# Altium PCB PCB_C70005-A2.PcbDoc (part 2 of 3)
Units mm, origin at the board's own origin, x right, y up, seen from the top; angles counter-clockwise.
Board outline 80.01 x 50.8 mm, 2 copper layers (Top Layer, Bottom Layer); 96 components, 58 nets, 254 pads, 376 vias.
Unrouted connection lines stored in the file: 49.
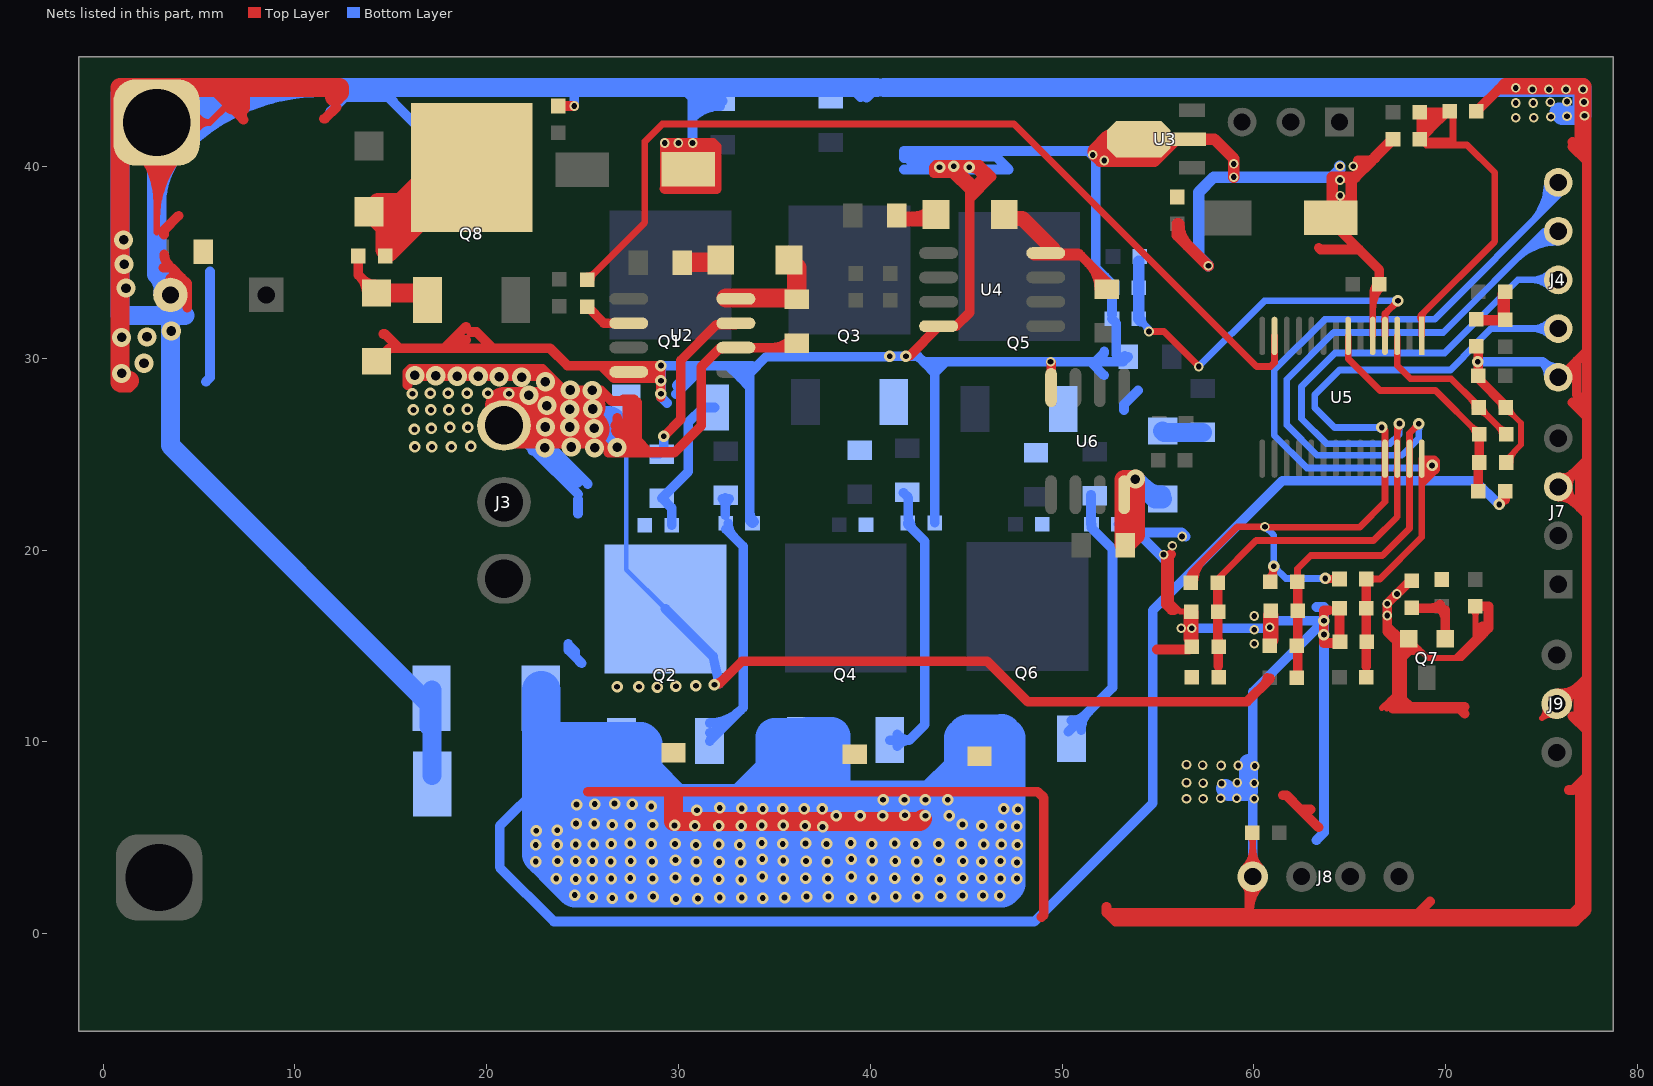
[diagram p2: the nets of this part, all layers, seen from the top]

## Via types
v1: diameter 0.6, hole 0.3, Top Layer to Bottom Layer, 247 vias
v2: diameter 1, hole 0.5, Top Layer to Bottom Layer, 69 vias
v3: diameter 0.5, hole 0.3, Top Layer to Bottom Layer, 60 vias

## Nets (pads, with @x,y where several pads share a name; then routed paths per layer and width w, separated by ;. In a path a pad name is that pad's centre, name@x,y a point inside that pad or via, vN(x,y) a via of type N, cw(c..) or ccw(c..) an arc to the next point about the centre after c; other vN are vias at no path point) (continued)
GND: C1.1 C4.1 C5.1 C6.2 C7.1 C8.1 C9.2 C10.2 C11.2 C12.1 C14.1 C16.1 C17.1 C19.1 C20.2 C21.1 C23.2 C25.2 C26.1 C27.1 D4.1 J2.1 J4.5 J7.3 J8.4 J9.2 Q7.2 R10.2 R12.1 R18.2 R22.2 R25.2 R31.2 R37.2 R39.2 R40.2 R44.1 R46.1 Rt1.2 U2.4 U3.2 U4.4 U5.5 U6.4 | length 766.8
  Top Layer w0.3: 55.708,19.806 55.677,19.776 55.677,17.272 56.159,16.789 56.591,16.789 56.744,16.789 ; 66.675,11.76 67.094,12.179 ; 66.929,11.725 66.929,11.773 67.335,12.179 ; 67.335,15.367 67.361,15.342 67.361,14.643 ; 67.412,11.725 67.412,11.963 67.627,12.179 ; 67.742,14.275 68.155,14.688 ; 67.894,11.725 67.894,11.913 67.627,12.179 ; 68.386,11.725 68.281,11.831 67.742,12.37 67.361,12.751 ; C21.1@71.388,16.905 cw(c70.994,16.511) 71.552,16.511 cw(c72.109,16.511) C21.1@71.715,16.905 ; C21.1@71.552,17.069 71.552,15.443 70.485,14.376 ; 72.009,15.697 72.009,15.545 70.841,14.376 70.485,14.376 ; C26.1@73.127,27.201 cw(c73.127,26.643) 73.521,27.038 cw(c73.915,27.432) C26.1@73.358,27.432 ; C26.1@73.127,27.432 73.937,26.622 73.937,25.487 73.152,24.702 73.152,24.562 ; 73.383,24.562 cw(c74.278,24.562) 73.645,25.195 ; J9.2@75.173,11.797 cw(c74.63,11.629) 75.032,11.227 ; J9.2@75.601,11.368 ccw(c75.433,10.825) 75.032,11.227 ; J9.2@75.794,11.989 75.032,11.227 ; 67.094,12.179 67.361,12.446 ; 67.094,12.179 67.335,12.179 ; 67.335,12.179 67.627,12.179 ; 67.361,12.446 67.361,12.751 ; 67.361,12.446 67.627,12.179 ; 67.361,12.751 67.361,14.643 ; 67.361,14.643 67.405,14.688 ; 67.405,14.688 67.742,14.688 68.155,14.688 ; 67.405,14.688 67.56,14.843 ; 67.56,14.843 67.742,14.843 68.609,14.843 ; 67.56,14.843 67.742,15.024 Q7.2@68.085,15.367 68.609,14.843 ; 68.155,14.688 68.764,14.688 ; 68.609,14.843 68.764,14.688 ; 68.764,14.688 69.075,14.376 70.485,14.376
  Top Layer w0.35: J2.1@1.574,41.071 cw(c-1.371,38.126) 2.794,38.126 cw(c6.959,38.126) J2.1@4.014,41.071 ; J2.1@1.822,41.319 cw(c-0.526,38.971) 2.794,38.971 cw(c6.114,38.971) J2.1@3.766,41.319 ; J2.1@2.069,41.566 cw(c0.319,39.816) 2.794,39.816 cw(c5.269,39.816) J2.1@3.519,41.566 ; 2.794,36.576 J2.1@2.794,42.291 5.563,42.291 ; 2.794,37.282 cw(c7.803,37.282) J2.1@4.261,40.824 ; C9.2@3.683,33.608 3.75,33.541 C9.2@3.763,33.528 ; J2.1@4.45,41.807 cw(c5.096,41.618) 5.096,42.291 cw(c5.096,42.964) J2.1@4.45,42.775 ; J2.1@4.786,41.709 cw(c5.563,41.482) 5.563,42.291 ; J2.1@4.786,42.873 ccw(c5.563,43.1) 5.563,42.291 ; 7.163,43.891 6.764,43.493 6.756,43.485 6.51,43.239 5.563,42.291 ; J8.4@59.502,3.414 ccw(c58.435,4.481) 59.944,4.481 ccw(c61.453,4.481) J8.4@60.386,3.414 ; C20.2@59.773,5.112 cw(c59.36,4.699) 59.944,4.699 ; C20.2@59.919,5.258 59.944,5.232 J8.4@59.944,2.972 ; 59.944,4.822 cw(c60.355,4.822) C20.2@60.064,5.112 ; J8.4@60.02,2.972 J8.4@60.02,3.632 ; U5.5@66.198,31.166 66.198,33.508 C23.2@66.548,33.858 ; 66.198,32.515 cw(c67.891,32.515) C23.2@66.694,33.713 ; 66.198,33.36 cw(c67.046,33.36) C23.2@66.446,33.96
  Top Layer w0.5: 24.213,29.616 25.959,29.616 ; U2.4@27.772,29.286 U2.4@27.407,29.286 26.568,29.286 26.238,29.616 ; U2.4@28.169,29.21 28.677,29.21 v1(29.083,29.616) ; v1@29.068,27.976 29.083,27.991 v1(29.083,28.143) v1(29.083,28.829) 29.083,29.159 ; v1@43.383,40.03 43.307,39.954 43.307,39.649 44.272,39.649 45.187,38.735 ; v1@44.323,40.081 44.499,39.905 45.187,39.218 45.187,38.735 ; 45.187,36.246 45.187,38.33 45.187,38.735 ; v3@49.403,29.794 49.428,29.769 U6.4@49.428,28.473 ; 56.591,16.789 56.591,15.342 56.871,15.621 ; 56.744,16.789 56.871,16.789 56.871,15.621 ; 56.864,15.051 56.871,15.058 56.871,15.621 ; C11.2@64.383,36.773 65.483,35.673 66.548,34.608 C23.2@66.548,33.858 ; 64.44,15.469 64.465,15.494 64.465,16.967 ; 67.584,15.367 ccw(c67.584,15.867) Q7.2@67.938,15.514 ; Q7.2@68.085,15.367 67.615,15.367 ; R46.1@68.224,18.39 68.147,18.39 v3(66.954,17.197) v3(66.954,16.586) 66.954,16.027 ; C21.1@71.552,17.069 72.238,17.069 ; C27.1@71.603,30.632 71.704,30.531 R44.1@71.704,29.083 71.704,28.932 73.127,27.51 C26.1@73.127,27.432 ; R12.1@71.603,42.875 R12.1@71.806,43.078 ; C26.1@72.848,27.788 cw(c72.492,27.432) C26.1@72.996,27.432 ; J7.3@75.87,23.292 75.968,23.292 J7.3@76.251,23.292 ; J4.5@75.87,28.804 J4.5@75.87,29.007 J4.5@75.993,29.007 ; 76.632,29.007 J4.5@75.993,29.007 ; 77.365,27.584 76.846,28.103 76.846,29.859 ; 77.365,30.378 76.846,29.859 ; 25.959,29.616 26.238,29.616 ; 25.959,29.616 26.619,28.956 28.103,28.956 28.88,28.956 29.083,29.159 ; 26.238,29.616 v1(29.083,29.616) ; 29.083,29.159 v1(29.083,29.616) ; 66.954,16.027 67.615,15.367 ; 66.954,16.027 66.954,15.748 67.335,15.367 67.615,15.367 ; J4.5@75.993,29.007 76.846,29.859
  Top Layer w0.508: 0.635,28.702 0.863,28.474 1.381,28.474 ; 3.15,34.722 3.565,34.722 4.094,34.193 ; 3.175,36.449 3.175,36.674 3.937,37.436 ; 3.632,34.29 3.509,34.167 C9.2@3.509,33.608 ; 4.393,32.639 4.393,33.894 4.094,34.193 ; 5.842,43.907 6.51,43.239 7.26,42.489 ; 6.756,44.119 6.756,43.501 6.764,43.493 7.163,43.094 ; 7.163,43.891 7.26,43.794 7.26,42.998 ; 7.315,42.434 7.26,42.489 ; 7.315,42.942 7.26,42.998 ; 11.506,42.494 11.573,42.494 12.166,43.088 ; D4.1@14.249,29.845 14.92,30.515 15.443,30.515 ; 14.605,31.267 14.691,31.267 15.443,30.515 ; 18.92,30.947 18.872,30.947 18.44,30.515 ; 18.92,31.648 17.787,30.515 ; 19.177,31.369 19.466,31.369 20.32,30.515 ; C5.1@23.8,43.155 v3(24.562,43.155) ; 24.213,29.616 23.314,30.515 20.32,30.515 ; U2.4@27.772,29.286 28.103,28.956 ; v1@42.012,30.099 U4.4@43.586,31.674 ; v1@43.383,40.03 43.434,40.081 44.323,40.081 45.706,40.081 46.322,39.465 45.187,38.33 ; U4.4@43.561,31.674 U4.4@43.586,31.674 ; v1@44.499,39.905 45.49,39.905 45.72,39.675 ; 45.187,36.246 45.187,32.385 44.475,31.674 U4.4@43.586,31.674 ; 45.187,38.735 45.755,39.303 46.101,39.303 ; v3(51.6,40.602) 51.968,40.234 52.719,40.234 ; 52.324,1.397 52.324,1.092 ; 52.77,40.284 52.719,40.234 ; 54.954,14.814 56.622,14.814 56.769,14.961 ; 55.677,19.776 55.408,19.507 55.408,17.159 55.702,16.866 55.855,16.866 ; U3.2@56.544,41.429 56.034,41.429 54.839,40.234 52.719,40.234 ; J8.4@59.558,2.586 cw(c59.055,2.083) 59.766,2.083 ; 59.766,1.224 cw(c61.691,1.224) J8.4@60.33,2.586 ; J8.4@59.944,2.972 59.766,2.794 59.766,1.041 ; 61.519,7.214 61.699,7.214 62.436,6.477 ; 62.951,6.477 62.436,6.477 ; 63.373,5.54 62.436,6.477 ; 63.38,35.763 63.47,35.673 65.483,35.673 ; 63.916,16.856 63.643,16.856 63.643,15.148 64.424,15.148 64.491,15.215 ; 65.42,40.312 66.144,40.312 66.294,40.462 ; 67.261,11.725 67.412,11.725 67.894,11.725 68.386,11.725 70.738,11.725 70.993,11.47 ; v3@67.347,17.596 v3(67.459,17.707) ; 67.742,12.37 67.742,14.275 67.742,14.688 67.742,14.843 Q7.2@67.742,15.024 ; 68.281,11.831 70.993,11.831 ; 69.19,1.676 68.555,1.041 ; 71.73,15.697 72.009,15.697 72.238,15.926 ; R12.1@71.806,43.078 72.746,44.018 ; 71.907,16.027 72.009,15.926 72.238,15.926 ; 72.243,16.712 72.243,17.063 72.238,17.069 72.238,15.926 ; J9.2@75.794,11.989 76.019,11.989 76.922,12.892 ; J9.2@75.863,12.53 ccw(c76.024,13.79) 76.922,12.892 ; J7.3@75.87,22.796 cw(c75.87,21.49) 76.793,22.413 ; J7.3@75.968,23.292 76.649,23.973 ; J7.3@75.972,22.806 cw(c76.109,22.154) 76.581,22.625 ; J7.3@75.976,23.776 ccw(c76.133,24.489) 76.649,23.973 ; J9.2@76.34,11.989 cw(c77.114,11.989) 76.566,12.536 ; J7.3@76.363,23.24 ccw(c77.117,23.161) 76.581,22.625 ; 76.421,7.493 76.654,7.493 77.365,8.204 ; 76.619,11.33 77.365,10.584 ; 76.619,23.973 76.649,23.973 ; 76.619,27.69 77.365,26.944 ; 76.619,41.025 77.365,40.279 ; 76.619,41.275 77.365,40.529 ; 76.647,23.971 ccw(c77.326,23.292) 76.366,23.292 ccw(c77.455,23.292) 76.685,22.521 ; 76.987,7.671 76.987,1.422 76.606,1.041 68.555,1.041 ; 77.089,11.278 76.922,11.444 76.922,12.892 ; 77.089,23.546 76.997,23.454 ; C9.2@3.509,33.608 C9.2@3.509,33.299 3.75,33.541 C9.2@3.962,33.753 ; C9.2@3.509,33.608 C9.2@3.962,34.061 ; C9.2@3.962,33.753 C9.2@3.962,34.061 ; C9.2@3.962,33.753 4.094,33.884 4.094,34.193 ; C9.2@3.962,34.061 4.094,34.193 ; 7.163,43.094 7.26,42.997 ; 7.163,43.094 7.26,42.998 ; 7.26,42.489 7.26,42.997 ; 15.443,30.515 17.787,30.515 ; 17.787,30.515 18.44,30.515 ; 18.44,30.515 20.32,30.515 ; v3@29.286,41.078 29.286,38.862 29.261,38.837 29.286,38.811 31.979,38.811 31.979,40.767 ; v3@29.286,41.078 v3(29.286,41.224) v3(29.997,41.224) v3(30.734,41.224) ; v3@29.286,41.078 29.607,40.757 ; 29.607,40.757 29.616,40.767 ; 29.607,40.757 C10.2@30.512,39.852 30.734,40.074 30.734,40.767 ; 29.616,40.767 29.997,40.767 30.734,40.767 ; 29.616,40.767 29.896,41.046 v3@30.734,41.046 ; 30.734,40.767 31.979,40.767 ; 30.734,40.767 v3@30.734,41.046 ; v3@30.734,41.046 31.979,41.046 ; v3@30.734,41.046 v3(30.734,41.224) ; v3(30.734,41.224) 31.801,41.224 31.979,41.046 ; 31.979,40.767 31.979,41.046 ; 52.324,1.092 52.781,0.635 60.173,0.635 ; 52.324,1.092 59.715,1.092 59.766,1.041 ; 59.766,1.041 68.555,1.041 ; 59.766,1.041 60.173,0.635 ; 60.173,0.635 76.784,0.635 77.365,1.216 77.365,8.204 ; 72.746,44.018 v3(74.524,44.018) v3(75.387,44.018) v3(76.276,44.018) 76.886,44.018 76.962,43.942 76.962,41.348 77.365,40.945 ; 72.746,44.018 73.092,44.365 76.276,44.365 77.216,44.365 77.365,44.216 77.365,40.945 ; 76.581,22.625 76.997,22.209 ; 76.649,23.973 76.835,23.973 ; 76.649,23.973 77.365,24.689 ; 76.835,23.973 77.17,23.973 77.365,23.778 ; 76.835,23.973 76.997,23.811 76.997,23.454 ; 76.922,12.892 77.365,13.335 ; 76.997,22.209 77.365,21.841 ; 76.997,22.209 76.997,23.454 ; 77.365,8.204 77.365,10.584 ; 77.365,10.584 77.365,13.335 ; 77.365,13.335 77.365,21.841 ; 77.365,21.841 77.365,23.778 ; 77.365,23.778 77.365,24.689 ; 77.365,24.689 77.365,26.944 ; 77.365,26.944 77.365,27.584 77.365,30.378 77.365,40.279 ; 77.365,40.279 77.365,40.529 ; 77.365,40.529 77.365,40.945 ; 3.188,35.42 ccw(c3.964,35.42) 3.415,34.871 cw(c3.964,35.42) 3.188,35.42
  Top Layer w0.6: 56.007,37.008 56.007,36.424 v3@57.62,34.811 ; 56.088,37.008 ccw(c57.694,37.008) 56.558,35.872 ; U3.2@56.544,41.429 57.936,41.429 58.953,40.411 v3(58.953,40.132) v3(58.953,39.446) ; C11.2@64.014,37.338 C11.2@64.084,37.407 ; C11.2@65.075,37.427 65.075,38.398 ; 66.144,40.312 65.278,39.446 ; 66.294,40.462 C7.1@67.259,41.427 ; C11.2@64.084,37.407 65.075,38.398 ; C11.2@64.084,37.407 64.084,38.481 64.084,39.446 65.278,39.446 ; 65.075,38.398 65.075,39.243 65.278,39.446
  Top Layer w0.8: 60.884,15.316 60.884,16.586
  Top Layer w1: 1.381,28.829 1.305,28.753 0.881,28.753 J2.1@0.881,40.378 ; J2.1@2.794,42.291 J2.1@0.881,40.378 ; 6.756,43.205 6.756,43.485 6.756,43.501 ; 7.163,43.094 7.163,43.891 7.163,44.119 ; 12.065,43.619 12.319,43.873 12.319,44.119 7.163,44.119 ; J2.1@0.881,40.378 0.881,44.119 6.756,44.119 7.163,44.119 ; 51.816,40.767 53.332,40.767 U3.2@53.994,41.429 52.478,41.429 51.816,40.767
  Bottom Layer w0.3: R37.2@53.097,21.173 cw(c53.491,20.778) 53.491,21.336 cw(c53.491,21.894) R37.2@53.097,21.499
  Bottom Layer w0.35: J2.1@2.794,42.291 4.622,44.119 4.801,44.298
  Bottom Layer w0.5: v1@29.083,29.642 29.108,29.616 30.328,29.616 ; 29.921,28.575 29.921,28.6 30.328,29.007 ; 33.706,22.071 ccw(c34.542,22.071) R10.2@33.951,21.479 ; 33.833,29.595 33.577,29.339 ; 33.833,29.616 33.299,29.616 ; R10.2@33.858,21.387 33.706,21.539 33.706,28.495 ; 41.759,39.84 47.231,39.84 46.558,40.513 ; 42.215,40.513 42.494,40.792 46.279,40.792 ; R22.2@43.358,21.412 43.358,29.235 ; 43.891,40.513 46.558,40.513 ; 52.192,30.353 52.192,30.272 51.74,29.82 ; 52.197,29.108 51.486,29.82 ; 52.512,29.82 ccw(c52.512,30.876) C17.1@53.259,30.129 ; C8.1@52.603,32.055 52.832,31.826 52.832,30.175 C17.1@53.188,29.82 ; C8.1@52.603,32.258 52.603,33.882 52.237,34.248 51.75,34.735 51.75,40.401 51.359,40.792 46.279,40.792 ; R37.2@52.934,21.336 53.511,21.336 ; C17.1@53.442,30.074 C17.1@53.188,29.82 ; v3(56.769,15.926) 60.782,15.926 v3(60.833,15.977) 61.163,16.307 v1(63.652,16.307) 59.944,12.598 J8.4@59.944,2.972 ; v1(71.679,29.82) 75.057,29.82 ; J4.5@75.37,29.024 ccw(c74.3,29.062) 75.057,29.82 ; J4.5@75.852,29.506 cw(c75.814,30.577) 75.057,29.82 ; J4.5@75.87,29.007 75.057,29.82 ; 30.328,29.007 30.937,29.616 ; 30.328,29.007 30.328,29.616 ; 30.328,29.616 30.937,29.616 ; 30.937,29.616 31.35,29.616 32.584,29.616 ; 32.584,29.616 33.299,29.616 ; 32.584,29.616 33.219,28.981 ; 33.219,28.981 33.706,28.495 ; 33.219,28.981 33.577,29.339 ; 33.219,28.981 33.219,29.536 33.299,29.616 ; 33.299,29.616 33.577,29.339 ; 33.577,29.339 33.706,29.21 ; 33.706,28.495 33.706,29.21 ; 33.706,29.21 34.573,30.078 40.873,30.078 40.894,30.099 v1(41.021,30.099) v1(41.859,30.099) 42.494,30.099 42.774,29.82 ; 42.774,29.82 42.977,29.82 ; 42.774,29.82 42.875,29.718 ; 42.875,29.718 43.358,29.235 ; 42.875,29.718 42.977,29.82 ; 42.977,29.82 43.942,29.82 ; 43.358,29.235 43.942,29.82 ; 43.942,29.82 v3(49.403,29.82) 51.486,29.82 ; 46.279,40.792 46.558,40.513 ; 51.486,29.82 51.74,29.82 ; 51.74,29.82 C17.1@53.188,29.82
  Bottom Layer w0.508: 5.359,28.778 5.579,28.998 5.579,34.519 ; 11.862,42.875 12.598,43.612 13.08,43.612 ; 12.573,44.119 13.08,43.612 ; 15.113,43.416 14.917,43.612 14.859,43.612 ; 16.18,42.291 14.859,43.612 ; v3(24.562,43.155) 24.562,43.967 24.714,44.119 ; v1@29.083,29.642 v1(29.083,29.616) v1(29.083,28.829) v1(29.083,28.143) 29.083,27.978 29.397,27.663 ; v3(29.286,41.224) v3(29.997,41.224) v3(30.734,41.224) 30.734,42.545 ; 29.873,28.139 31.35,29.616 ; 30.175,44.119 30.734,43.56 30.734,43.028 ; 30.751,42.562 cw(c32.182,41.131) C1.1@32.182,43.155 ; 31.42,44.119 31.42,43.713 30.734,43.028 ; C1.1@32.051,43.191 ccw(c31.497,42.264) 30.734,43.028 ; C1.1@32.309,43.409 31.598,43.409 30.734,42.545 ; 39.192,43.916 39.489,43.619 ; 39.805,43.581 40.343,44.119 40.716,44.119 ; 41.759,40.437 41.759,40.819 51.772,40.819 51.799,40.792 ; 51.359,40.792 51.799,40.792 ; 52.192,33.401 52.192,34.203 52.237,34.248 ; v3@52.197,40.395 51.799,40.792 ; 53.229,27.305 53.229,27.584 53.966,28.321 ; 53.511,21.336 53.934,20.914 ; v3@55.296,19.551 53.934,20.914 ; v3@56.45,20.706 56.242,20.914 53.934,20.914 ; 63.265,4.872 63.662,5.269 63.662,17.033 63.265,17.033 ; 13.08,43.612 14.859,43.612 ; 30.734,42.545 30.734,43.028
  Bottom Layer w0.6: v3(57.633,34.823) 57.125,35.331 57.125,38.659 57.912,39.446 v3(58.953,39.446) 64.084,39.446 64.491,39.853 v3(64.491,40.005)
  Bottom Layer w1: 2.794,35.991 ccw(c6.201,35.991) C9.2@3.792,33.582 ; 2.794,38.066 cw(c7.019,38.066) 4.031,41.054 cw(c11.432,33.653) 11.432,44.119 ; J2.1@2.794,42.291 2.794,34.37 ; C9.2@3.115,33.366 ccw(c1.981,33.557) 2.794,34.37 ; J2.1@3.324,41.761 cw(c9.018,36.067) 9.018,44.119 ; 4.267,32.233 3.509,32.233 ; 16.993,10.795 16.993,11.963 3.509,25.447 3.509,32.233 ; 17.145,8.255 17.145,12.7 ; 40.343,44.119 31.42,44.119 30.175,44.119 24.714,44.119 12.573,44.119 4.622,44.119 1.21,44.119 0.881,43.79 0.881,36.17 0.881,32.233 3.509,32.233 ; 40.716,44.119 75.387,44.119 77.119,44.119 77.119,42.672 76.073,42.672 75.921,42.824 ; 42.215,40.513 43.891,40.513 ; 58.522,7.567 58.674,7.414 59.131,7.414 59.72,7.414 59.72,8.861 ; 2.794,34.37 3.509,33.655 C9.2@3.509,33.299 3.509,32.233
  other v1: 63.652,15.596 43.612,39.954 45.161,39.954 44.348,40.005
  other v2: 0.965,29.21 2.134,29.743 0.965,31.09 2.286,31.115 3.556,31.42 1.194,33.655 1.092,34.9 1.067,36.17
  other v3: 56.49,7.036 57.353,7.036 60.02,7.036 58.268,7.061 59.106,7.061 58.318,7.823 57.353,7.849 60.02,7.849 56.49,7.874 59.131,7.874 60.046,8.738 58.293,8.763 59.182,8.763 57.328,8.788 56.49,8.814 60.02,15.113 60.02,15.85 56.21,15.926 60.02,16.561 55.296,19.761 55.753,20.218 56.261,20.706 64.503,38.481 64.491,39.294 65.185,40.005 52.197,40.31 73.66,42.545 74.6,42.545 75.489,42.596 76.327,42.621 77.241,42.647 73.66,43.307 74.574,43.307 75.463,43.358 77.216,43.358 76.327,43.383 77.165,44.018 73.66,44.094
HA: C14.2 J4.2 R15.2 R18.1 R20.2 U5.27 | length 52.8
  Top Layer w0.35: 62.281,18.034 62.281,18.364 62.281,19.025 62.967,19.71 66.7,19.71 68.118,21.128 U5.27@68.118,24.766 68.118,26.091 v1(68.605,26.579) v1@68.605,26.67 ; v1@68.48,26.579 cw(c68.179,26.579) 68.392,26.365 cw(c68.605,26.152) v1@68.605,26.454
  Top Layer w0.5: 62.281,13.487 62.281,18.034 ; 62.281,18.364 62.401,18.484
  Bottom Layer w0.35: v1@68.517,26.49 cw(c68.304,26.277) 68.605,26.277 cw(c68.907,26.277) v1@68.694,26.49 ; v1(68.605,26.579) 68.605,25.832 67.716,24.943 63.297,24.943 61.722,26.518 61.722,28.905 64.16,31.344 69.875,31.344 75.159,36.627 J4.2@75.87,36.627 ; 73.674,35.142 cw(c75.87,32.947) J4.2@75.87,36.052 ; 74.272,35.74 cw(c75.87,34.142) J4.2@75.87,36.402 ; 74.869,36.337 cw(c75.87,35.337) J4.2@75.87,36.752
HB: C16.2 J4.1 R24.2 R25.1 R26.2 U5.28 | length 56.2
  Top Layer w0.35: R26.2@65.862,18.517 R26.2@65.862,18.491 66.573,18.491 68.758,20.676 68.758,23.419 ; R26.2@66.008,18.346 cw(c66.36,17.994) 66.36,18.491 cw(c66.36,18.989) R26.2@66.008,18.637 ; v1(69.291,24.409) 69.266,24.409 v1@69.19,24.334 ; v1@69.291,24.663 69.189,24.766 ; 68.758,23.419 69.113,23.774 ; 68.758,23.419 U5.28@68.758,23.774 ; U5.28@68.758,23.774 69.113,23.774 ; U5.28@68.758,23.774 U5.28@68.758,24.079 ; U5.28@68.758,24.079 68.936,24.079 ; U5.28@68.758,24.079 U5.28@68.758,24.766 ; U5.28@68.758,24.766 69.189,24.766 ; U5.28@68.758,24.766 v1@69.038,24.486 ; 68.936,24.079 v1@69.19,24.334 ; 68.936,24.079 69.063,24.079 v1@69.291,24.308 ; 68.936,24.079 68.936,24.384 v1@69.038,24.486 ; v1@69.038,24.486 v1@69.19,24.334 ; 69.113,23.774 69.291,23.952 ; 69.189,24.766 69.392,24.766 69.52,24.638 69.52,24.181 69.291,23.952 ; v1@69.19,24.334 69.203,24.321 69.216,24.308 v1@69.291,24.308 ; 69.291,23.952 v1@69.291,24.308
  Top Layer w0.5: 65.862,13.919 R26.2@65.862,18.491
  Bottom Layer w0.35: 68.683,24.282 ccw(c68.683,25.018) v1@69.203,24.498 ; v1(69.291,24.409) 69.164,24.282 62.763,24.282 61.062,25.984 61.062,29.388 63.703,32.029 69.418,32.029 75.87,38.481 J4.1@75.87,39.167 ; 74.403,37.014 ccw(c72.251,39.167) J4.1@75.295,39.167 ; 75.001,37.612 ccw(c73.446,39.167) J4.1@75.645,39.167 ; 75.598,38.209 ccw(c74.641,39.167) J4.1@75.995,39.167
HC: C19.2 J4.3 R28.2 R31.1 R32.2 U5.26 | length 47.1
  Top Layer w0.35: 58.102,18.479 60.122,20.498 66.243,20.498 67.478,21.732 U5.26@67.478,24.145 ; 58.115,13.97 58.141,13.945 58.191,13.894 ; U5.26@67.462,24.13 U5.26@67.478,24.145 ; 67.478,26.023 cw(c68.161,26.023) v1@67.678,26.505 ; v1(67.589,26.594) 67.478,26.482 U5.26@67.478,24.766 U5.26@67.478,24.145
  Top Layer w0.5: 58.115,15.342 58.115,18.288 ; 58.141,13.945 58.141,15.342
  Bottom Layer w0.35: v1@67.501,26.505 cw(c67.288,26.292) 67.589,26.292 cw(c67.891,26.292) v1@67.678,26.505 ; v1(67.589,26.594) 67.589,26.035 67.101,25.547 63.785,25.547 62.484,26.848 62.484,28.524 64.237,30.277 69.952,30.277 73.762,34.087 J4.3@75.87,34.087 ; J4.3@75.463,33.68 ccw(c74.482,32.699) 74.482,34.087 ccw(c74.482,35.475) J4.3@75.463,34.493
HS: J4.4 R20.1 R26.1 R32.1 U5.25 | length 52
  Top Layer w0.35: R20.1@56.573,18.434 ccw(c56.221,18.785) 56.718,18.785 ccw(c57.216,18.785) R20.1@56.864,18.434 ; R20.1@56.574,18.288 cw(c57.453,18.288) 56.832,18.909 ; R20.1@56.718,18.288 56.718,18.796 59.131,21.209 v3(60.579,21.209) 60.604,21.184 65.507,21.184 66.838,22.515 U5.25@66.838,24.766 66.838,26.228 v1(66.675,26.391) ; R20.1@56.924,18.288 cw(c58.648,18.288) 57.429,19.507 ; R32.1@60.728,18.498 ccw(c60.19,19.152) v1(61.036,19.152) 61.036,18.517 R32.1@60.858,18.339 ; v1@60.928,19.089 cw(c60.667,18.938) 60.958,18.86 cw(c61.25,18.782) v1@61.099,19.043 ; v1@60.948,19.063 cw(c60.734,18.85) 61.036,18.85 cw(c61.338,18.85) v1@61.125,19.063 ; v1(63.729,18.517) 63.754,18.491 R26.1@64.465,18.491 ; v1@63.791,18.408 cw(c64.006,18.036) R26.1@64.117,18.451 ; v1@63.817,18.605 ccw(c64.092,18.88) R26.1@64.092,18.491 ; v1@63.824,18.597 ccw(c64.009,18.753) 64.072,18.519 ; R26.1@64.32,18.346 ccw(c63.968,17.994) 63.968,18.491 ccw(c63.968,18.989) R26.1@64.32,18.637
  Bottom Layer w0.35: v3(60.579,21.209) 60.604,21.209 61.036,20.777 v1(61.036,19.152) 61.671,18.517 v1(63.729,18.517) ; v1@60.948,19.24 ccw(c60.734,19.453) 61.036,19.453 ccw(c61.338,19.453) v1@61.125,19.24 ; v1@61.036,19.027 cw(c61.036,18.725) 61.25,18.938 cw(c61.463,19.152) v1@61.161,19.152 ; v1@63.64,18.428 ccw(c63.427,18.215) 63.427,18.517 ccw(c63.427,18.818) v1@63.64,18.605 ; v1@66.587,26.302 ccw(c66.373,26.089) 66.373,26.391 ccw(c66.373,26.692) v1@66.587,26.479 ; v1(66.675,26.391) 64.211,26.391 63.17,27.432 63.17,28.092 64.465,29.388 70.256,29.388 70.95,30.081 70.95,30.122 72.375,31.547 J4.4@75.87,31.547 ; J4.4@75.463,31.14 ccw(c74.482,30.159) 74.482,31.547 ccw(c74.482,32.935) J4.4@75.463,31.953
IAVG: C26.2 R41.1 U5.3 | length 10.7
  Top Layer w0.35: U5.3@67.478,31.166 67.478,29.626 68.174,28.931 70.282,28.931 C26.2@71.501,27.711 ; 71.342,27.87 cw(c70.904,27.432) C26.2@71.524,27.432 ; C26.2@71.465,27.748 ccw(c71.73,28.013) C26.2@71.73,27.638 ; C26.2@71.73,27.226 cw(c71.73,26.667) 72.125,27.062 ; C26.2@71.73,27.432 71.755,27.432 R41.1@73.152,26.035 ; C26.2@71.936,27.432 ccw(c72.372,27.432) C26.2@72.063,27.124 ; R41.1@72.946,26.035 ccw(c72.449,26.035) 72.8,26.387 ccw(c73.152,26.738) R41.1@73.152,26.241
IOCP: C25.1 R38.2 R41.2 U5.7 | length 13.4
  Top Layer w0.35: U5.7@64.918,31.166 64.918,29.977 66.573,28.321 69.469,28.321 R41.2@71.755,26.035 ; R41.2@71.549,26.035 ccw(c71.052,26.035) 71.403,26.387 ccw(c71.755,26.738) R41.2@71.755,26.241 ; 71.704,24.511 71.755,24.562
  Top Layer w0.5: 71.704,23.063 71.704,24.511 ; 71.704,24.123 cw(c72.194,24.123) 71.848,24.469 ; 71.755,24.562 R41.2@71.755,25.654
NetC2_1: C2.1 D1.2 Q1.1 R2.2 R4.1 U2.8 | length 13.5
  Top Layer w1: U2.8@32.487,33.147 C2.1@35.941,33.147 ; D1.2@35.76,35.128 36.17,34.719 C2.1@36.17,33.071
  Bottom Layer w0.5: R2.2@29.642,21.285 29.642,22.2 R4.1@29.134,22.708 30.505,24.079 30.505,26.645 31.293,27.432 Q1.1@31.877,27.432
NetC2_2: C2.2 J3.1 Q1.3 Q2.2 R2.1 R15.1 U2.6 | length 133.1
  Top Layer w0.5: v2@25.654,25.908 26.441,25.121 27.813,25.121 ; 26.695,26.492 27.292,25.895 28.067,25.121 ; 26.721,26.213 27.813,25.121 ; 26.797,26.899 26.797,26.772 27.337,26.232 27.838,25.73 ; 27.127,27.857 27.337,27.857 27.693,27.857 27.838,27.711 27.838,25.73 ; v1@31.877,13.029 ccw(c31.877,13.641) 32.309,13.208 ; 32.016,30.391 cw(c32.283,30.124) U2.6@32.283,30.501 ; v1@32.131,13.03 33.299,14.199 ; 34.868,30.556 ccw(c34.868,31.96) C2.2@35.86,30.967 ; C2.2@35.636,30.556 U2.6@32.995,30.556 32.182,30.556 31.191,29.566 31.191,26.492 29.82,25.121 28.448,25.121 ; 27.813,25.121 28.067,25.121 ; 27.838,25.73 28.448,25.121 ; 28.067,25.121 28.448,25.121
  Top Layer w0.508: 15.875,28.6 v2@15.875,28.804 ; v2@24.079,27.504 24.079,28.27 v2@23.292,29.058 ; v2@24.409,28.321 v2(25.502,28.321) 25.959,28.321 26.515,27.765 27.127,27.765 ; 26.34,25.07 29.769,25.07 29.82,25.121 ; 27.292,25.895 27.337,25.94 27.337,26.232 27.337,27.857 ; 33.299,14.199 46.101,14.199 48.209,12.09 59.639,12.09 60.858,13.31 ; 60.58,13.031 ccw(c60.277,13.335) 60.706,13.335 ; v2@15.875,28.804 15.875,29.286 16.027,29.439 18.466,29.439 21.819,29.439 22.911,29.439 v2@23.292,29.058 ; v2@15.875,28.804 16.129,29.058 v2(18.466,29.058) v2(19.558,29.058) 21.819,29.058 v2@23.292,29.058
  Top Layer w2: v2@25.201,27.504 24.079,27.504 20.9,27.504 J3.1@20.9,26.5 ; J3.1@20.9,26.5 23.063,26.5 25.189,26.5 25.4,26.289 21.111,26.289 J3.1@20.9,26.5
  Bottom Layer w0.254: Q1.3@27.277,27.432 27.277,18.979 Q2.2@29.323,16.933
  Bottom Layer w0.5: Q2.2@29.323,16.933 31.801,14.455 32.129,13.038 v1@32.131,13.03
  Bottom Layer w0.508: J3.1@20.9,26.5 21.176,26.5 22.504,25.171 ; 22.377,25.171 22.504,25.171 ; 22.479,26.5 22.479,26.238 23.216,25.502 25.273,23.444 ; v2@22.936,25.349 24.765,23.52 ; 24.257,15.113 24.257,15.054 ; 24.765,21.895 24.765,22.635 ; 24.765,22.911 22.504,25.171 ; 24.952,14.097 24.599,14.45 ; 24.257,15.054 24.257,14.792 24.599,14.45 ; 24.257,15.054 24.599,14.712 24.599,14.45
  Bottom Layer w2: J3.1@21.176,26.5 22.479,26.5 23.063,26.5 25.629,26.5 26.345,26.5
  other v1: 28.905,12.852 26.797,12.878 27.94,12.878 29.87,12.903 30.912,12.929 31.877,12.979 16.256,25.375 17.145,25.375 18.161,25.375 19.177,25.4 16.231,26.289 17.12,26.34 18.085,26.391 19.025,26.391 16.18,27.305 17.094,27.305 18.034,27.305 18.999,27.33 16.129,28.143 21.158,28.143 17.069,28.169 17.983,28.169 18.974,28.169 20.066,28.169
  other v2: 23.038,25.324 25.629,25.324 26.797,25.349 24.409,25.375 25.603,26.34 23.063,26.416 24.333,26.416 24.333,27.33 25.527,27.356 23.139,27.534 22.2,28.067 24.359,28.346 23.063,28.778 21.819,29.007 20.65,29.032 17.348,29.083 16.256,29.108
NetC3_1: C3.1 C15.1 C22.1 Q2.3 Q4.3 Q6.3 R38.1 R39.1 R40.1 | length 297.6
  Top Layer w0.5: v1@72.768,22.418 ccw(c72.311,23.063) 73.101,23.063 73.101,22.682 ; 72.974,23.03 cw(c72.314,22.86) v1(72.796,22.377) 73.101,22.682 ; 73.101,22.631 73.101,22.682
  Top Layer w0.508: 25.273,7.391 48.739,7.391 49.047,7.083 49.047,0.976 48.935,0.864
  Top Layer w1: 29.743,7.137 29.743,5.842 33.274,5.842 37.516,5.842 42.596,5.842 v1@42.723,5.969
  Bottom Layer w0.5: 20.676,5.613 20.676,5.603 ; 22.87,7.798 22.845,7.772 20.676,5.603 ; v1@72.784,22.365 71.545,23.603 61.475,23.603 54.737,16.866 54.737,6.807 48.561,0.631 23.499,0.631 20.676,3.454 20.676,5.603
  Bottom Layer w0.508: Q6.3@45.489,9.649 45.489,10.414 Q6.3@45.489,10.516
  Bottom Layer w2: 22.845,12.7 22.845,10.185 ; 26.213,6.782 25.476,7.518 25.197,7.798 ; Q4.3@36.421,10.084 36.269,10.236 35.027,10.236 35.027,8.509 v1@33.325,6.807 ; v1@22.845,5.222 22.845,7.772 22.845,8.255 ; v1@22.845,5.222 23.431,4.635 23.749,4.318 26.467,4.318 28.372,4.318 ; v1@22.845,5.222 22.845,4.13 23.012,3.962 23.863,3.111 24.613,2.362 24.638,2.362 27.534,2.362 29.87,2.362 33.274,2.362 35.458,2.362 43.637,2.362 ; 22.845,8.255 25.245,8.255 Q2.3@26.364,9.374 ; 22.845,8.255 22.845,10.185 ; 22.845,10.185 22.997,10.033 Q2.3@27.023,10.033 ; 24.105,5.664 22.87,6.898 22.87,7.798 25.197,7.798 ; 24.105,5.664 25.197,6.756 25.197,7.798 ; 24.105,5.664 24.663,5.664 26.109,5.664 26.364,5.92 Q2.3@26.364,9.374 ; Q2.3@26.364,9.374 Q2.3@27.023,10.033 ; Q2.3@27.023,10.033 28.042,10.033 28.169,9.906 28.169,8.433 ; 28.169,5.69 28.169,6.756 28.169,7.468 ; 28.169,5.69 28.816,5.042 29.82,5.042 30.937,5.042 34.379,5.042 ; 28.169,5.69 28.169,5.664 28.169,4.521 28.372,4.318 ; 28.169,7.468 28.829,6.807 29.794,6.807 ; 28.169,7.468 28.169,8.433 ; 28.169,8.433 29.794,6.807 ; 28.372,4.318 28.626,4.318 29.845,4.318 32.106,4.318 33.249,4.318 33.655,4.318 ; 29.794,6.807 32.156,6.807 v1@33.325,6.807 ; v1@33.325,6.807 34.77,6.807 ; 33.655,4.318 34.379,5.042 ; 33.655,4.318 35.433,4.318 37.084,4.318 ; 34.379,5.042 35.024,5.687 35.024,6.378 35.052,6.35 35.611,5.791 37.084,4.318 ; 34.77,6.807 36.751,8.788 ; 34.77,6.807 35.888,6.807 36.751,7.671 ; 36.751,7.671 36.751,6.429 37.973,5.207 ; 36.751,7.671 36.751,8.788 ; 36.751,8.788 36.751,10.287 37.973,10.287 37.973,7.391 ; 37.084,4.318 37.973,5.207 ; 37.084,4.318 37.516,4.318 40.107,4.318 41.656,4.318 ; 37.973,5.207 37.973,7.391 ; 37.973,5.207 38.075,5.105 38.227,5.105 40.081,5.105 41.808,5.105 42.443,5.105 ; 37.973,7.391 38.379,6.985 v1(40.665,6.985) v1(41.783,6.985) v1(42.875,6.985) 43.231,6.985 ; 41.656,4.318 43.129,4.318 45.898,7.087 47.092,7.087 ; 41.656,4.318 42.443,5.105 ; 42.443,5.105 v1@44.323,6.985 ; 43.231,6.985 44.856,8.611 44.856,10.211 45.06,10.414 45.489,10.414 Q6.3@45.872,10.414 ; 43.231,6.985 v1(44.044,6.985) v1@44.323,6.985 ; 43.637,2.362 45.199,3.924 ; 43.637,2.362 45.822,2.362 46.863,2.362 47.092,2.591 ; v1@44.323,6.985 45.895,8.557 Q6.3@45.895,10.16 45.895,10.391 Q6.3@45.872,10.414 ; 45.199,3.924 v1(45.923,4.648) 47.092,5.817 ; 45.199,3.924 45.593,3.531 46.063,3.061 46.533,2.591 47.092,2.591 ; Q6.3@45.872,10.414 46.838,10.414 46.863,10.439 47.092,10.211 47.092,7.087 ; 47.092,2.591 47.092,3.785 47.092,5.817 ; 47.092,5.817 47.092,7.087
  other v1: 29.87,1.803 31.013,1.829 26.543,1.854 34.392,1.854 39.04,1.854 32.156,1.88 33.299,1.88 35.535,1.88 40.183,1.88 25.502,1.905 27.534,1.93 28.677,1.93 36.678,1.93 37.821,1.93 41.326,1.93 42.469,1.93 43.663,1.956 44.806,1.981 45.872,1.981 46.761,1.981 24.587,2.007 30.937,2.819 33.274,2.819 43.637,2.819 24.638,2.845 32.106,2.845 23.622,2.87 25.502,2.87 26.492,2.87 28.651,2.87 35.458,2.87 37.795,2.87 40.107,2.87 42.443,2.87 46.787,2.87 47.65,2.87 27.483,2.896 36.627,2.896 41.275,2.896 44.831,2.896 45.822,2.896 29.845,2.921 34.366,2.972 39.014,2.972 33.249,3.708 47.65,3.708 32.131,3.734 22.555,3.759 26.467,3.759 28.626,3.759 30.937,3.759 37.77,3.759 42.418,3.759 45.822,3.759 23.698,3.785 24.638,3.785 25.502,3.785 27.508,3.785 36.652,3.785 41.3,3.785 44.831,3.785 46.787,3.785 35.458,3.81 40.107,3.81 29.845,3.835 43.586,3.835 34.366,3.886 39.014,3.886 22.555,4.623 23.673,4.623 30.912,4.623 33.198,4.623 47.676,4.623 24.638,4.648 25.552,4.648 32.106,4.648 46.838,4.648 26.492,4.674 28.575,4.674 29.82,4.674 35.433,4.674 37.719,4.674 40.081,4.674 42.367,4.674 43.561,4.674 44.755,4.674 27.483,4.699 36.627,4.699 41.275,4.699 34.341,4.724 38.989,4.724 22.581,5.359 23.673,5.385 37.516,5.563 47.65,5.588 30.861,5.613 32.106,5.613 33.274,5.613 36.601,5.613 45.822,5.613 46.838,5.613 29.794,5.639 34.341,5.639 35.458,5.639 26.543,5.664 27.483,5.664 28.651,5.664 44.806,5.69 24.663,5.74 25.603,5.74 38.227,6.147 39.472,6.147 40.64,6.147 42.875,6.147 44.12,6.147 41.808,6.172 30.963,6.426 47.701,6.477 34.392,6.502 35.433,6.502 36.551,6.502 37.49,6.502 46.965,6.502 33.299,6.528 32.156,6.553 28.575,6.629 24.689,6.731 25.629,6.756 27.584,6.756 26.67,6.782
NetC7_2: C7.2 R5.1 R12.2 U5.1 | length 28.1
  Top Layer w0.35: C7.2@68.656,41.3 C7.2@68.656,41.326 ; U5.1@68.733,32.016 cw(c69.318,32.016) 68.904,32.43 ; U5.1@68.738,32.001 cw(c68.911,32.131) 68.758,32.283 ; U5.1@68.758,31.166 68.758,32.283 ; C7.2@68.986,41.123 71.12,41.123 72.568,39.675 72.568,36.093 68.758,32.283 ; 69.418,42.342 69.507,42.253 ; 70.383,41.326 C7.2@68.656,41.326 ; 70.383,41.427 70.383,42.697 R12.2@70.206,42.875 ; C7.2@68.656,41.326 C7.2@68.974,41.643 ; C7.2@68.656,41.326 C7.2@68.656,41.427 R5.1@68.656,42.824 ; R5.1@68.656,42.824 68.58,42.901 70.18,42.901 R12.2@70.206,42.875 ; R5.1@68.656,42.824 69.571,42.824 R12.2@69.863,42.532 ; C7.2@68.974,41.643 69.507,42.177 ; C7.2@68.974,41.643 68.974,42.012 ; 68.974,42.012 69.151,42.189 69.151,42.253 ; 68.974,42.012 68.974,42.431 ; 68.974,42.431 68.872,42.532 R12.2@69.863,42.532 ; 68.974,42.431 69.151,42.253 ; 69.151,42.253 69.507,42.253 ; 69.507,42.177 69.507,42.253 ; 69.507,42.177 R12.2@69.863,42.532 ; R12.2@69.863,42.532 R12.2@70.206,42.875
NetC8_2: C8.2 R6.1 Rt1.1 U5.4 | length 24.1
  Top Layer w0.35: v3(54.534,31.394) 55.321,31.394 v3@57.137,29.578 ; U5.4@66.813,32.016 cw(c67.485,32.016) 67.01,32.491 ; U5.4@66.838,31.166 66.838,32.319 ; 66.838,32.334 66.838,32.319 ; v1@67.388,32.995 cw(c67.086,32.995) 67.3,32.781 cw(c67.513,32.568) v1@67.513,32.87 ; v1(67.513,32.995) 66.838,32.319
  Bottom Layer w0.35: C8.2@53.975,31.877 54,31.902 C8.2@54,32.055 54.534,31.521 v3(54.534,31.394) ; C8.2@54,31.849 cw(c54,31.351) 54.352,31.703 cw(c54.704,32.055) C8.2@54.206,32.055 ; 54,32.741 54.051,32.69 ; C8.2@54.316,31.739 cw(c53.971,31.394) v3@54.459,31.394 ; v3(57.125,29.566) 60.554,32.995 v1(67.513,32.995) ; v1@67.425,32.906 ccw(c67.211,32.693) 67.211,32.995 ccw(c67.211,33.296) v1@67.425,33.083
  Bottom Layer w0.6: C8.2@54,32.055 54,32.741 R6.1@54,35.052
NetC13_1: C13.1 D2.2 Q3.1 R14.2 R17.2 U4.8 | length 10.8
  Top Layer w0.5: U4.8@48.532,35.344 50.99,35.344 ; U4.8@49.733,35.484 50.851,35.484 50.99,35.344 ; 51.379,34.955 cw(c50.028,33.604) C13.1@51.939,33.604 ; C13.1@52.324,33.604 52.324,34.011 50.99,35.344
  Top Layer w0.8: D2.2@46.936,37.287 47.93,37.287 U4.8@49.543,35.674
NetC18_1: C18.1 D3.2 Q5.1 R30.2 R34.2 U6.8 | length 11.4
  Top Layer w1: U6.8@53.238,23.114 v2@53.797,23.673 ; U6.8@53.238,23.114 53.238,23.673 v2@53.797,23.673 ; U6.8@53.238,23.114 U6.8@53.238,22.885 53.238,20.295 C18.1@53.289,20.244 53.823,20.777 v2(53.823,23.698) v2@53.797,23.673
  Bottom Layer w1: v2(53.823,23.698) 54.861,22.66 D3.2@55.245,22.66 ; 54.292,23.229 ccw(c55.183,24.12) D3.2@55.183,22.86
NetC27_2: C27.2 R42.2 R43.1 | length 11
  Top Layer w0.35: C27.2@71.399,31.877 C27.2@71.603,31.877 ; C27.2@71.603,32.029 R42.2@72.873,32.029 ; C27.2@71.73,32.004 C27.2@71.603,31.877 ; 72.297,31.877 ccw(c72.297,32.808) 72.956,32.15 cw(c72.665,32.44) 72.665,32.029 ; 72.543,32.029 cw(c72.543,31.445) R42.2@72.956,31.858 ; 72.873,32.428 cw(c74.15,32.428) R43.1@73.247,33.332 ; 72.873,33.053 ccw(c74.15,33.053) R42.2@73.247,32.15 ; R43.1@72.873,33.35 R42.2@72.873,32.029 ; C27.2@71.603,31.877 72.847,31.877 72.898,31.928 72.873,31.953 R42.2@72.873,32.004 ; R42.2@72.873,32.004 R42.2@72.873,32.029 ; R42.2@72.873,32.004 R42.2@73.101,32.004 73.076,32.029 R42.2@72.873,32.029
  Top Layer w0.5: C27.2@71.73,32.004 R42.2@72.873,32.004 ; R42.2@73.101,32.004 R43.1@73.101,33.477
NetD1_1: D1.1 R1.2 | length 2
  Top Layer w1: R1.2@30.251,35.001 32.08,35.001 D1.1@32.207,35.128
NetD2_1: D2.1 R13.2 | length 3
  Top Layer w0.8: R13.2@41.377,37.262 43.358,37.262 D2.1@43.383,37.287 ; 42.308,37.262 ccw(c42.308,38.555) D2.1@43.222,37.641
NetD3_1: D3.1 R29.2 | length 2.1
  Bottom Layer w1: D3.1@55.245,26.213 55.321,26.137 R29.2@57.328,26.137
NetD4_2: D4.2 Q8.1 R8.1 | length 10.4
  Top Layer w0.5: R8.1@13.31,35.331 13.31,34.338 D4.2@14.249,33.398 ; 13.375,34.272 cw(c12.501,33.398) D4.2@13.737,33.398 ; 13.525,34.122 ccw(c14.187,34.785) D4.2@14.187,33.848 ; D4.2@14.63,33.08 cw(c15.398,32.312) 15.398,33.398 cw(c15.398,34.484) D4.2@14.63,33.716 ; 15.474,33.398 ccw(c15.474,34.938) Q8.1@16.563,33.849 ; 15.944,33.398 cw(c15.944,32.523) Q8.1@16.563,33.142 ; Q8.1@16.564,33.398 Q8.1@16.916,33.045
  Top Layer w1: D4.2@14.249,33.398 Q8.1@16.564,33.398
NetQ2_1: Q2.1 R9.2 R10.1 | length 17.5
  Bottom Layer w0.5: Q2.1@31.623,10.033 33.376,11.786 33.376,20.191 R10.1@32.473,21.094 ; Q2.1@31.623,10.483 ccw(c31.623,11.569) 32.391,10.801 ; Q2.1@31.623,10.983 ccw(c31.623,13.277) 33.245,11.655 ; R9.2@32.279,22.678 cw(c31.9,22.298) 32.436,22.298 ; 32.436,21.819 R9.2@32.436,22.733 ; 32.436,22.176 cw(c33.145,22.176) R9.2@32.644,22.678 ; R10.1@32.592,21.387 ccw(c33.587,21.387) 32.884,20.684
NetQ4_1: Q4.1 R21.2 R22.1 | length 16.3
  Bottom Layer w0.5: Q4.1@41.021,10.084 42.037,10.084 ; Q4.1@41.417,9.779 cw(c42.037,9.302) 42.037,10.084 ; Q4.1@41.417,10.389 ccw(c42.037,10.866) 42.037,10.084 ; R21.2@41.732,22.987 41.986,22.733 R22.1@41.986,21.641 ; R22.1@41.961,21.412 41.961,21.334 42.85,20.445 42.85,10.897 42.037,10.084 ; R22.1@42.092,21.412 ccw(c42.596,21.412) R22.1@42.239,21.056
NetQ6_1: Q6.1 R36.2 R37.1 | length 15.7
  Bottom Layer w0.5: Q6.1@50.317,10.516 52.629,12.827 52.629,20.064 51.537,21.157 R37.1@51.537,21.336 ; Q6.1@50.495,11.11 ccw(c50.495,12.116) 51.206,11.405 ; Q6.1@50.995,10.61 cw(c52.404,10.61) 51.408,11.606 ; R37.1@51.511,21.336 R36.2@51.511,22.887
NetQ7_1: Q7.1 R45.2 R46.2 | length 5.7
  Top Layer w0.35: 69.698,16.967 69.799,17.069 69.99,16.878 ; Q7.1@69.799,15.557 Q7.1@69.99,15.367
  Top Layer w0.5: R46.2@68.224,16.967 69.698,16.967 ; 69.238,16.967 ccw(c69.238,17.63) 69.707,17.161 ; 69.707,16.976 cw(c69.023,16.293) 69.99,16.293 ; Q7.1@69.843,15.514 ccw(c69.489,15.867) 69.99,15.867 ccw(c70.49,15.867) Q7.1@70.136,15.514 ; Q7.1@69.99,15.367 69.99,16.878
NetQ8_2: Q8.2 R8.2 R23.2 | length 24.7
  Top Layer w1: R23.2@13.868,37.643 14.707,36.805 ; R23.2@13.868,37.643 15.037,37.643 ; R23.2@13.868,37.643 14.338,38.113 15.507,38.113 ; 14.707,36.805 16.076,36.805 Q8.2@16.914,37.643 ; 14.707,36.805 14.707,35.636 14.859,35.484 19.216,39.841 Q8.2@19.216,39.945 ; 15.037,37.643 Q8.2@16.914,37.643 ; 15.037,37.643 15.507,38.113 ; 15.507,38.113 17.339,39.945 Q8.2@19.216,39.945 ; Q8.2@16.914,37.643 Q8.2@19.216,39.945
NetR3_1: R3.1 U5.13 | length 49.2
  Top Layer w0.35: R3.1@25.248,34.087 28.245,37.084 28.245,41.3 29.159,42.215 47.498,42.215 60.147,29.566 60.875,29.566 61.078,29.769 U5.13@61.078,31.166 ; R3.1@25.248,34.293 ccw(c25.248,34.79) 25.599,34.438 ccw(c25.951,34.087) R3.1@25.454,34.087
NetR3_2: R3.2 U2.2 | length 2.5
  Top Layer w0.5: R3.2@25.248,32.69 26.111,31.826 U2.2@27.407,31.826
NetR4_2: R4.2 U2.7 | length 10.1
  Top Layer w0.5: v1(29.235,25.933) 30.124,26.822 30.124,29.896 31.979,31.75 U2.7@32.333,31.75 ; U2.7@32.995,31.75 U2.7@32.333,31.75 ; U2.7@32.995,31.826 32.41,31.826 U2.7@32.333,31.75
  Bottom Layer w0.5: R4.2@28.626,25.019 29.032,25.019 29.235,25.222 v1(29.235,25.933)